# Altium PCB PCB1.PcbDoc
Units mm, origin at the board's own origin, x right, y up, seen from the top; angles counter-clockwise.
Board outline 103.38 x 73.79 mm, 2 copper layers (Top Layer, Bottom Layer); 18 components, 9 nets, 42 pads, 0 vias.
Unrouted connection lines stored in the file: 1.
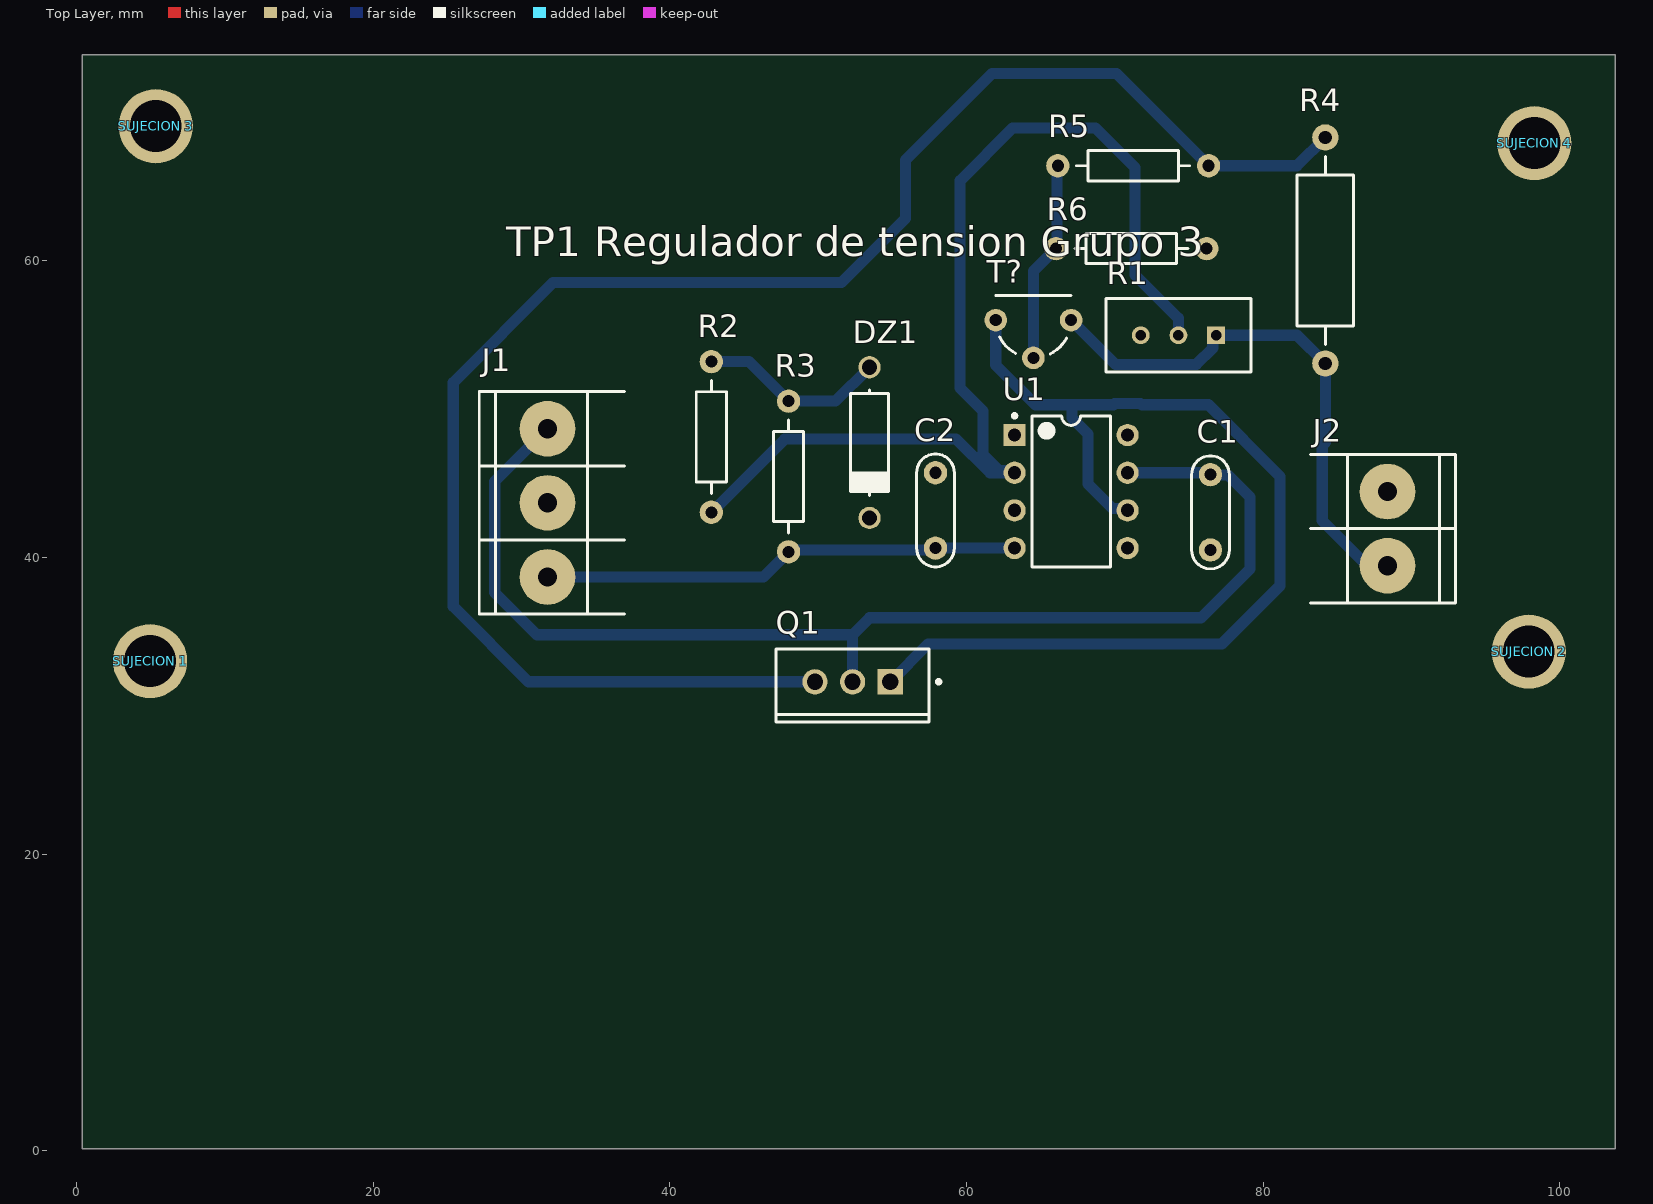
[diagram p0: Top Layer view]
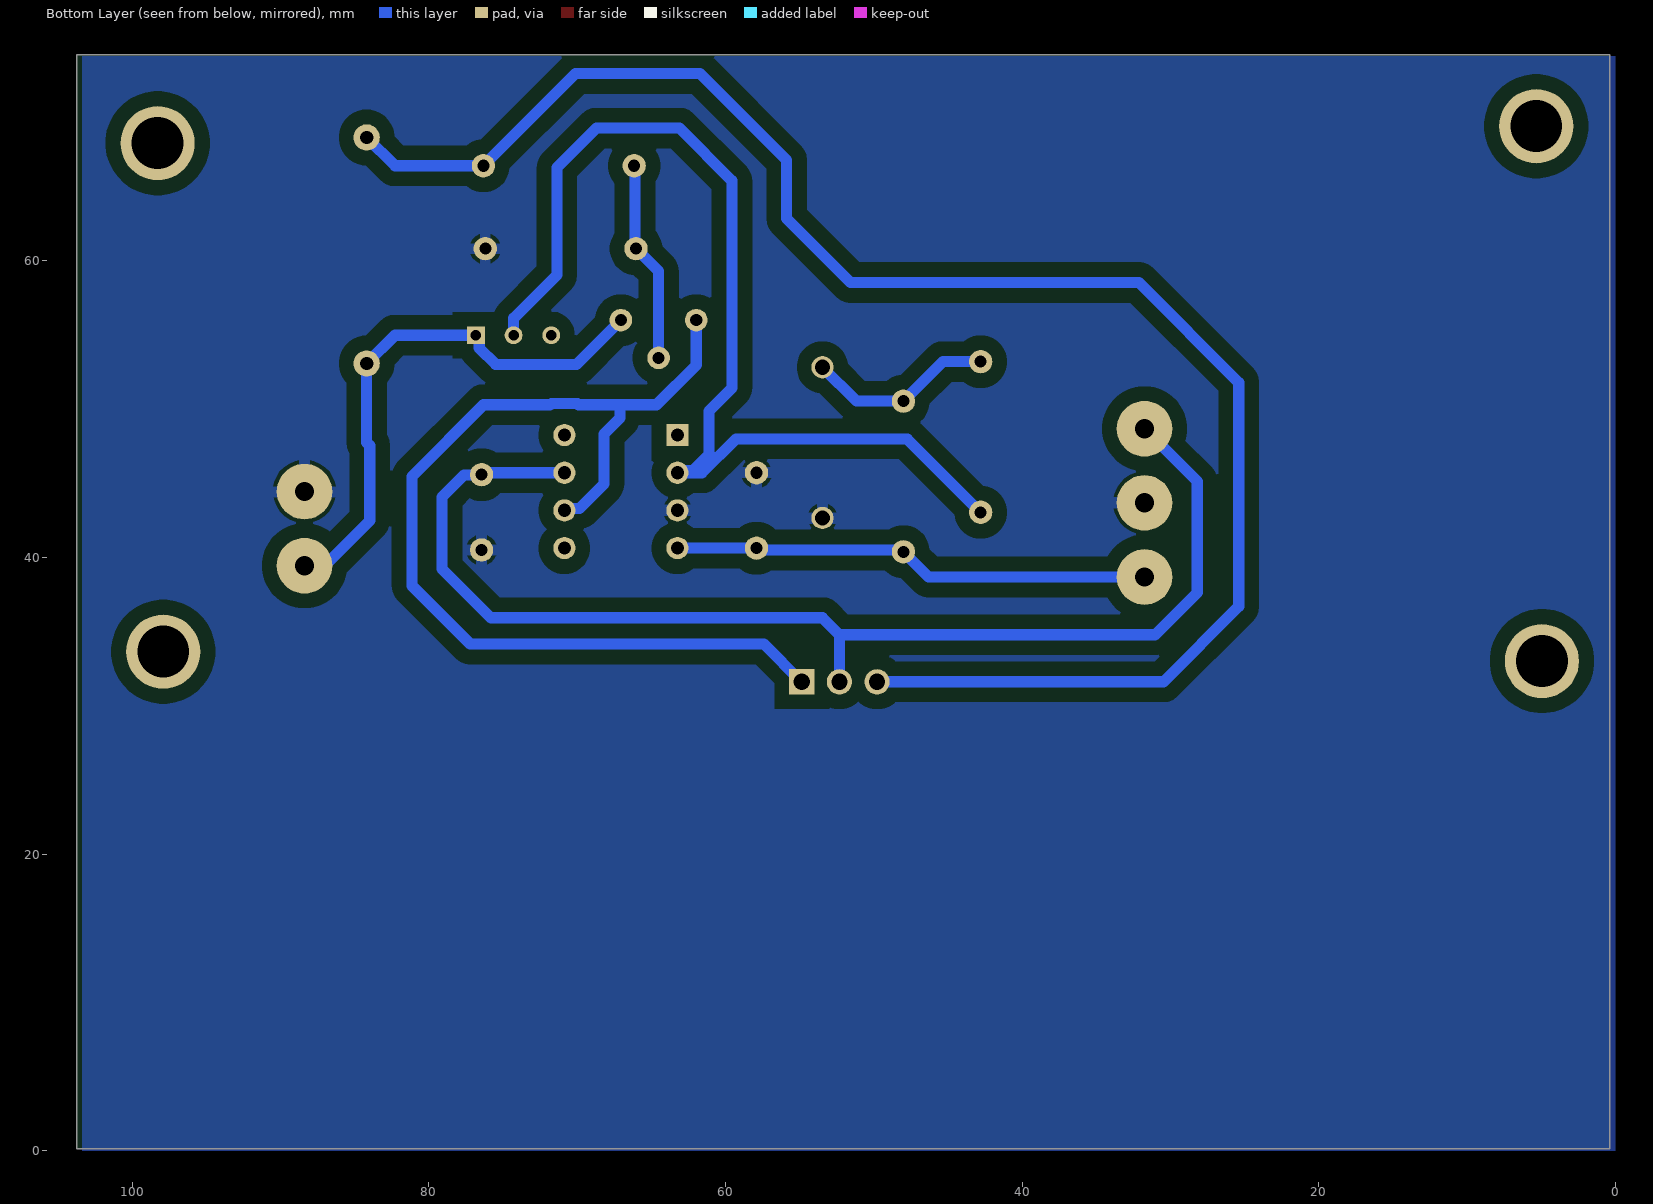
[diagram p1: Bottom Layer view, seen from below]
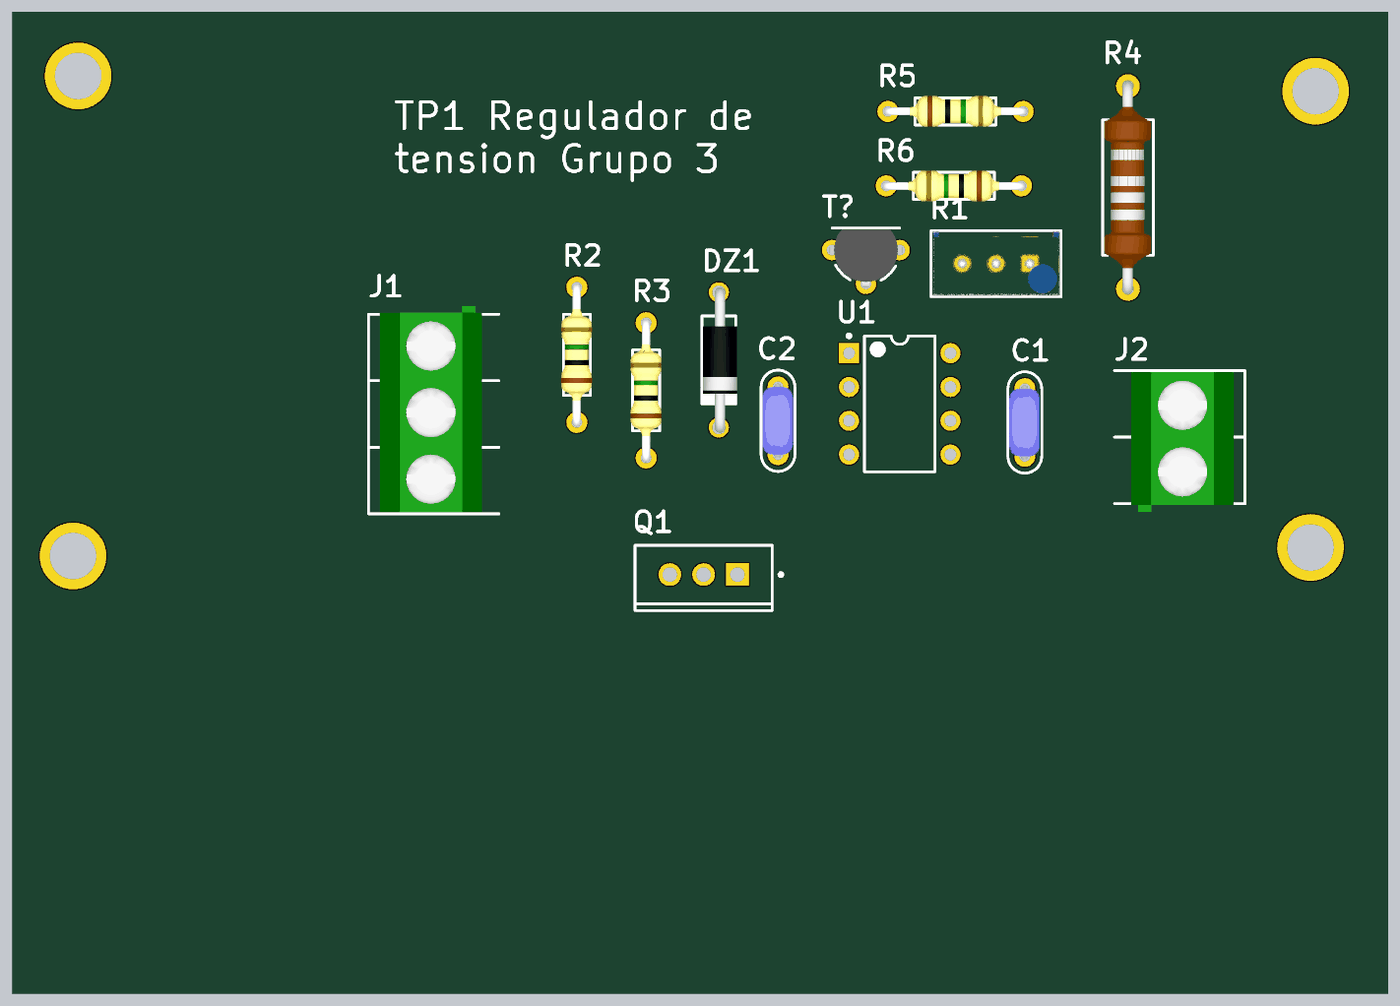
[diagram p2: 3D render of the assembled board from above, using the file's embedded part models]

## Layer stack, top to bottom
Top Solder: solder mask 0.0102, Solder Resist, Dk 3.5
Top Layer: signal copper 0.0356
Dielectric 1: dielectric 0.32, FR-4, Dk 4.8
Bottom Layer: signal copper 0.0356
Bottom Solder: solder mask 0.0102, Solder Resist, Dk 3.5

## Board outline
0.381,0.127 0.381,73.914 103.759,73.914 103.759,0.127

## Design rules (kind name [scope] priority, off if disabled: settings)
Clearance [All] p1: gap=1 ignorepadtopadclearanceinfootprint=FALSE
PlaneClearance [All] p1: clearance=1
PlaneConnect PlaneConnect_2 [All] p1: planeconnectstyle=Relief reliefexpansion=0.508 reliefentries=4 reliefconductorwidth=0.254 reliefairgap=0.254
PolygonConnect [All] p1: connectstyle=Relief reliefconductorwidth=0.75 reliefentries=4 polygonreliefangle="90 Angle" airgapwidth=0.254
RoutingVias [All] p1: holewidth=0.7 width=2 viastyle="Through Hole" minholewidth=0.7 minwidth=2 maxholewidth=0.7 maxwidth=2
SolderMaskExpansion [All] p1: expansion=0.102 istentingtop=FALSE
Width [All] p1: maxlimit=1 minlimit=0.5 preferedwidth=0.75
28 further rules are at their usual default settings.

## Components (designator, comment, footprint, x,y, rotation, side; value= is the part's Value field where it differs from the comment)
C1 "CAP" CAP200 76.454,43.053 r270 top
C2 "CAP" CAP200 57.912,43.18 r270 top
DZ1 "DIODO ZENER" DO41 53.467,47.752 r270 top
J1 "BORNERA 3" BORNERA3 31.75,43.688 r0 top
J2 "BORNERA 2" BORNERA2 88.392,41.95 r180 top
Q1 "TIP112" ONSC-TO-220-3-221A-09 52.324,31.623 r270 top
R1 "3296W-1-501LF" FP-3296W-MFG 74.295,54.986 r90 top
R2 "RES" RES400 42.799,43.053 r90 top
R3 "RES" RES400 48.006,40.386 r90 top
R4 "RES" RES600 84.201,53.086 r90 top
R5 "RES" RES400 66.167,66.421 r0 top
R6 "RES" RES400 76.2,60.833 r180 top
"SUJECION 1" "" "SUJECION (5.00MM - 3.50MM)" 4.953,33.02 r90 top
"SUJECION 2" "" "SUJECION (5.00MM - 3.50MM)" 97.917,33.655 r90 top
"SUJECION 3" "" "SUJECION (5.00MM - 3.50MM)" 5.334,69.088 r90 top
"SUJECION 4" "" "SUJECION (5.00MM - 3.50MM)" 98.298,67.945 r90 top
T? "TRANSISTOR NPN" TO92 64.516,54.737 r0 top
U1 "TL081CP" P0008A 67.056,44.45 r0 top

## Footprints (in the part's own frame and the unit in brackets; to place one, negate y for a bottom-side part, rotate by r counter-clockwise, add the part's x,y. Pads: shape width x height; smd on the part's side, far side on the other; paste and mask are expansions set on the pad)
BORNERA2 [mm] "Bornera con Tornillos 5mm separación"
  round 3.75 hole 1.3: 1(0,2.5) 2(0,-2.5)
  silkscreen extent -4.6,-5 5.2,5, body extent -3.76,-4.89 3.94,5.61, height 10
BORNERA3 [mm] "Bornera con Tornillos 5mm separación"
  round 3.75 hole 1.3: 1(0,5) 2(0,0) 3(0,-5)
  silkscreen extent -4.6,-7.5 5.2,7.5, body extent -3.76,-7.39 3.94,8.11, height 10.05
CAP200 [mil]
  round 62 hole 32: 1(-100,0) 2(100,0)
  silkscreen extent -150,-50 150,50, body extent -110,-46 110,44, height 246
DO41 [mm]
  round 1.5 hole 1.016: 1(-5.08,0) 2(5.08,0)
  silkscreen extent -3.56,-1.27 3.56,1.27, body extent -5.46,-1.19 5.46,1.37, height 2.03
FP-3296W-MFG [mm]
  rect 1.2x1.2 hole 0.7 paste-1000 mask+0: 1(0.005,-2.54)
  round 1.2 hole 0.7 paste-1000 mask+0: 2(0.005,0) 3(0.005,2.54)
  silkscreen extent -2.48,-4.89 2.48,4.89, body extent -2.41,-4.76 2.42,4.77, height 12.05
ONSC-TO-220-3-221A-09 [mm] "FM, 3-Leads, Body 10.3x4.85mm, Pitch 2.54mm"
  rect 1.7x1.7 hole 1.1: 1(0,2.54)
  round 1.7 hole 1.1: 2(0,0) 3(0,-2.54)
  silkscreen extent -2.2,-5.15 2.7,5.93, body extent -2.18,-5.15 2.67,5.15, height 19.85
P0008A [mm] "DIP, 8-Leads, Body 10.15x6.6mm, Pitch 2.54mm"
  rect 1.5x1.5 hole 0.9: 1(-3.81,3.81)
  round 1.5 hole 0.9: 2(-3.81,1.27) 3(-3.81,-1.27) 4(-3.81,-3.81) 5(3.81,-3.81) 6(3.81,-1.27) 7(3.81,1.27) 8(3.81,3.81)
  silkscreen extent -3.93,-5.1 2.65,5.23, body extent -3.95,-5.07 3.95,5.07, height 5.08
RES400 [mil]
  round 62 hole 32: 1(0,0) 2(400,0)
  silkscreen extent 50,-40 350,40, body extent -12,-45 412,46, height 96
RES600 [mil]
  round 70 hole 35: 1(0,0) 2(600,0)
  silkscreen extent 50,-75 550,75, body extent -16,-68 616,70, height 141
"SUJECION (5.00MM - 3.50MM)" [mm]
  round 5 hole 3.5: 1(0,0)
TO92 [mil]
  round 60 hole 32: 1(0,-50) 2(100,50) 3(-100,50)
  silkscreen extent -100,-39 100,115, body extent -110,-61 110,110, height 315

## Part data
Q1: library part CMP-1047-00137-1, "Plastic Medium-Power, Complementary Silicon Transistor, 3-Pin TO-220, Tube", Manufacturer="On Semiconductor", ComponentLink1Description="Manufacturer URL", ComponentLink1URL=http://www.onsemi.com/, ComponentLink2Description=Datasheet, ComponentLink2URL=http://www.onsemi.cn/pub_link/Collateral/TIP110-D.PDF, ComponentLink3Description="Package Specification", ComponentLink3URL=http://www.onsemi.com/pub_link/Collateral/221A-09.PDF, DatasheetVersion="Rev. 7", IC Continuous (A)=2, Mounting Technology="Through Hole", PackageDescription="3-Pin Flange Mount, Vertical Straight Lead, Body 9.97 x 4.445 mm, Pitch 2.54 mm", PackageReference=TO-220-3-221A-09, PackageVersion="Rev. AG, 09/2011", Packing=Tube, PartNumber=TIP112, Polarity=NPN, RoHS=FALSE
R1: library part CMP-07234-000046-1, "TRIMMER 500 OHM 0.5W PC PIN TOP", Color=Blue, Max Operating Temperature=125°C, Max Power Dissipation=500mW, Min Operating Temperature=-55°C, Package Quantity=50, Resistance=500R, Resistance Tolerance=10%, Resistor Type=Cermet, Temperature Coefficient=100ppm/°C, Contact Plating=Tin, Depth=4.83mm, Height=0.395inch, Lead Free="Lead Free", Length=9.53mm, Military Standard=Not, Mount="Through Hole", Number of Turns=25, Packaging=Rail/Tube, Power Rating=500mW, Radiation Hardening=No, REACH SVHC="No SVHC", RoHS Compliant=Yes, Series=3296, Taper=Linear, Technology=CERMET, Termination=Pin, Tolerance=10%, Weight=0.03oz, Width=9.53mm
"SUJECION 1" "SUJECION 2" "SUJECION 3" "SUJECION 4": library part SUJECION
U1: library part CMP-0017-00937-2, "JFET-Input Operational Amplifier, 7 to 36 V, 0 to 70 degC, 8-pin DIP (P8), Pb-Free (RoHS)", Manufacturer="Texas Instruments", Rating=Military, Total Supply Voltage(Max)(+5V is 5, +/-5V is 10)=36, Total Supply Voltage(Min)(+5V is 5, +/-5V is 10)=7, CMRR(Min)(dB)=70, Code_JEDEC=MS-001, ComponentLink1Description="Manufacturer URL", ComponentLink1URL=http://www.ti.com/, ComponentLink2Description=Datasheet, ComponentLink2URL=http://www.ti.com/lit/ds/symlink/tl081.pdf, ComponentLink3Description="Package Specification", ComponentLink3URL=http://www.ti.com/litv/pdf/mpdi001b, DatasheetVersion=SLOS081G, Eco-Plan="Pb-Free (RoHS)", GBW(Typ)(MHz)=3, IIB(Max)(pA)=400, Iq per channel(Max)(mA)=2.8, Mounting Technology="Through Hole", Number of Channels=1, Offset Drift(Typ)(uV/C)=18, PackageDescription="8-Pin Plastic In-Line, Body 9.59 x 6.35 mm, Pitch 2.54 mm", PackageReference=P0008A, PackageVersion="4040082/E, 04/2010", PartNumber=TL081CP, Slew Rate(Typ)(V/us)=13, Sub Family="General Purpose Amplifier, High Supply Voltage Amplifier (>=30V)", Vio (25C)(Max)(mV)=15, Vn at 1kHz(Typ)(nV/rtHz)=18

## Nets (pads, with @x,y where several pads share a name; then routed paths per layer and width w, separated by ;. In a path a pad name is that pad's centre, name@x,y a point inside that pad or via, vN(x,y) a via of type N, cw(c..) or ccw(c..) an arc to the next point about the centre after c; other vN are vias at no path point)
+VCC: C1.1 J1.1 Q1.2 U1.7 | length 83.3
  Bottom Layer w0.75: J1.1 28.194,45.132 28.194,37.648 31.047,34.795 52.324,34.795 ; Q1.2 52.324,34.795 ; U1.7 C1.1@76.454,45.72 ; C1.1 76.485,45.562 77.628,45.562 79.121,44.069 79.121,39.243 75.816,35.938 53.467,35.938 52.324,34.795
-VCC: C2.2 J1.3 R3.1 U1.4 | length 32.3
  Bottom Layer w0.75: J1.3 46.308,38.688 48.133,40.513 57.562,40.513 57.689,40.64 U1.4
GND: C1.2 C2.1 DZ1.2 J1.2 J2.2 R6.1 U1.3 | length 0.1
  Bottom Layer w0.75: 70.825,40.64 70.866,40.64 70.929,40.576
NetDZ1_1: DZ1.1 R2.2 R3.2 | length 12.7
  Bottom Layer w0.75: R2.2 45.339,53.213 R3.2 51.181,50.546 DZ1.1
NetJ2_1: J2.1 R1.1 R4.1 T?.2 | length 34.9
  Bottom Layer w0.75: T?.2 70.047,53.016 75.495,53.016 76.61,54.131 76.61,54.766 R1.1 82.296,54.991 R4.1 84.201,47.759 83.991,47.549 83.991,42.501 J2.1@86.741,39.751
NetQ1_1: Q1.1 T?.3 U1.6 | length 70.9
  Bottom Layer w0.75: Q1.1 57.404,34.163 77.216,34.163 81.153,38.1 81.153,45.466 76.315,50.304 71.827,50.304 71.746,50.385 69.986,50.385 69.905,50.304 67.121,50.304 ; T?.3 61.976,52.985 64.656,50.304 67.121,50.304 ; U1.6 70.735,43.311 69.846,43.311 68.199,44.958 68.199,48.338 67.121,49.416 67.121,50.304
NetQ1_3: Q1.3 R4.2 R5.2 | length 114.7
  Bottom Layer w0.75: Q1.3 30.48,31.623 25.4,36.703 25.4,51.816 32.131,58.547 51.562,58.547 55.88,62.865 55.88,66.802 61.722,72.644 70.104,72.644 R5.2 82.296,66.421 R4.2
NetR1_2: R1.2 R2.1 U1.2 | length 72.5
  Bottom Layer w0.75: R2.1 47.752,48.006 59.309,48.006 61.595,45.72 63.449,45.72 63.305,45.864 62.198,45.864 61.121,46.94 61.121,49.892 59.563,51.45 59.563,65.405 63.119,68.961 68.707,68.961 71.374,66.294 71.374,59.055 74.295,56.134 R1.2
NetR5_1: R5.1 R6.2 T?.1 | length 13.7
  Bottom Layer w0.75: T?.1 64.516,59.309 R6.2 66.103,60.896 66.103,66.358 R5.1 R5.1@66.23,66.358
pads on no net: "SUJECION 1.1" "SUJECION 2.1" "SUJECION 3.1" "SUJECION 4.1" R1.3 U1.1 U1.5 U1.8

## Polygon pours and split planes (outlines as drawn)
GND on Bottom Layer "GND_L02_P000" (solid, pour order 0): 0,73.787 103.378,73.787 103.378,0 0,0

## Silkscreen, mask and mechanical layers (free items; w line width, h text height)
Top Overlay:
  text "TP1 Regulador de tension Grupo 3" at 28.956,60.325 h2
Mechanical 1:
  the board outline again, w0.254
Mechanical 13:
  lines w0.254: -0.225,-0.508 -0.225,28.492 104.775,28.492 104.775,-0.508 -0.225,-0.508